# Altium PCB P503CA.PcbDoc
Units mm, origin at the board's own origin, x right, y up, seen from the top; angles counter-clockwise.
Board outline 26 x 26 mm, 2 copper layers (Top Layer, Bottom Layer); 2 components, 2 nets, 6 pads, 0 vias.
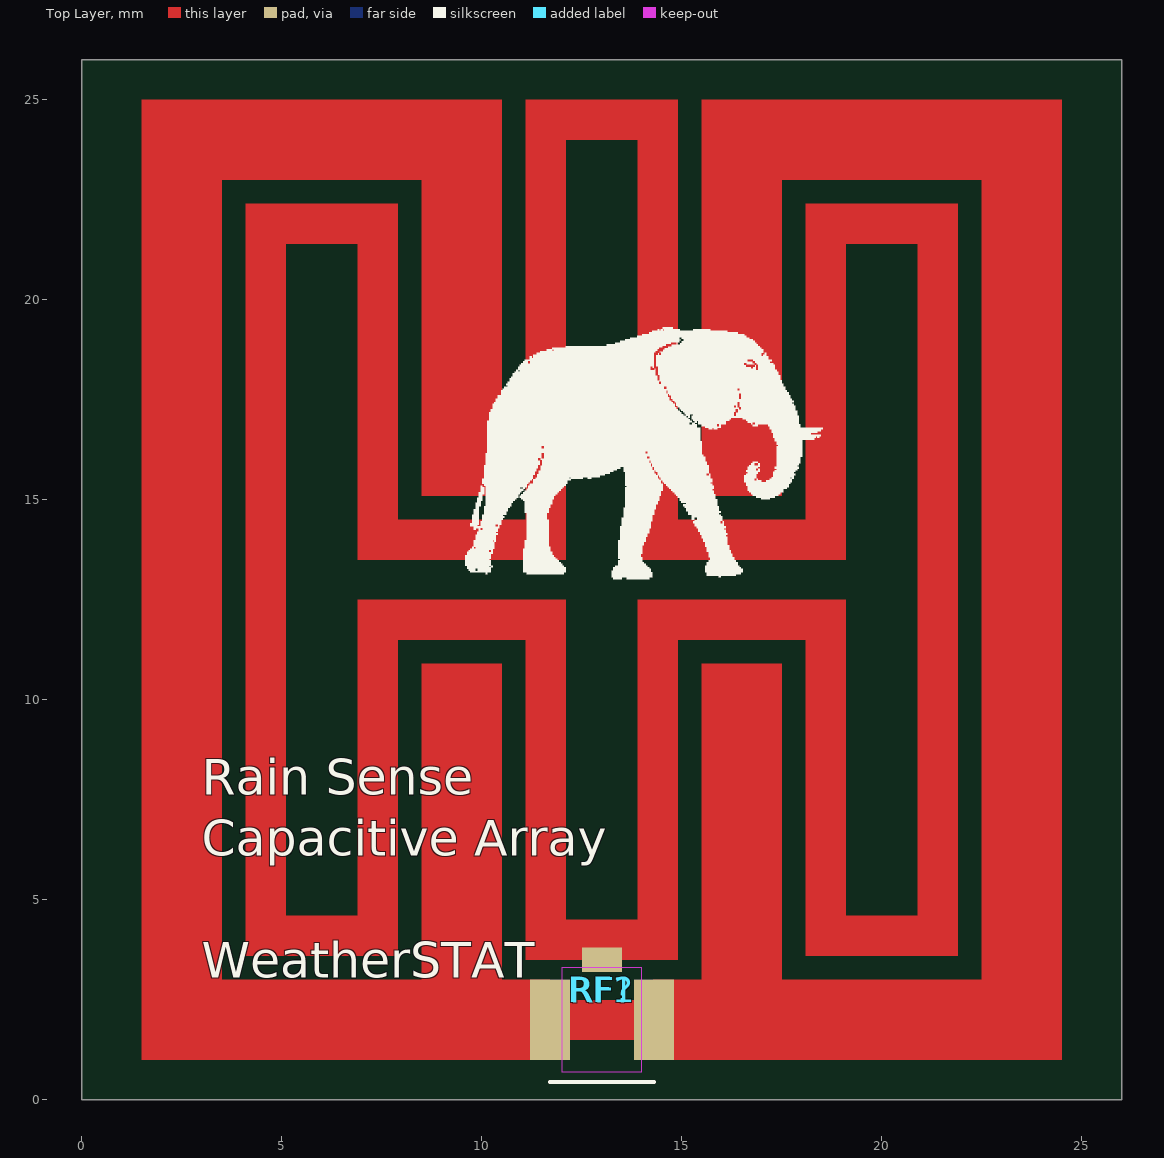
[diagram p0: Top Layer view]
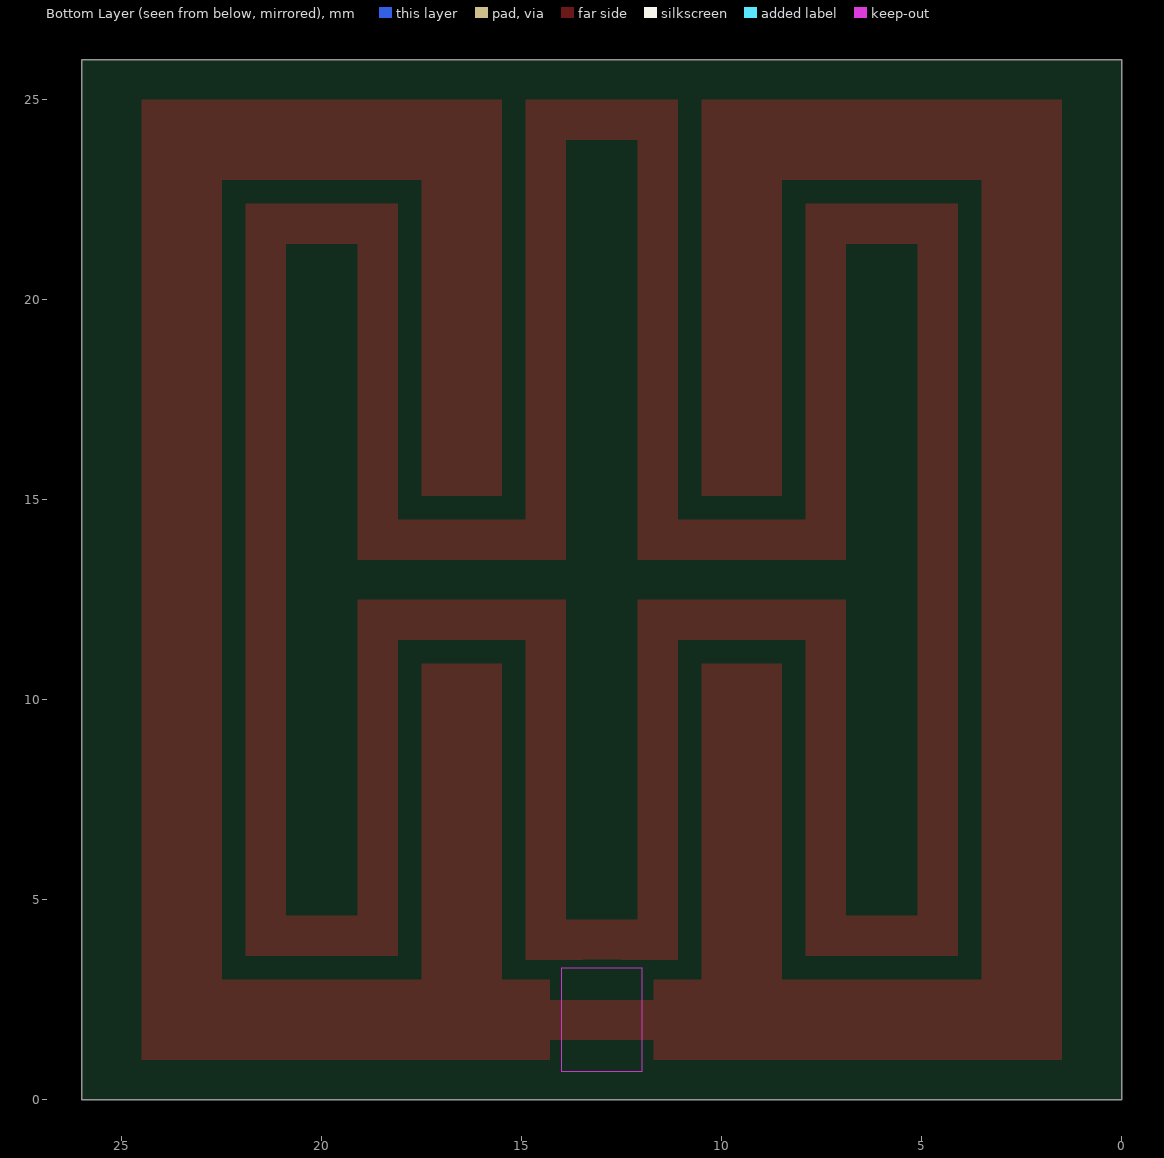
[diagram p1: Bottom Layer view, seen from below]

## Layer stack, top to bottom
Top Solder: solder mask 0.0102, Solder Resist, Dk 3.5
Top Layer: signal copper 0.0356
Dielectric 1: dielectric 0.32, FR-4, Dk 4.8
Bottom Layer: signal copper 0.0356
Bottom Solder: solder mask 0.0102, Solder Resist, Dk 3.5

## Board outline
0,0 0,26 26,26 26,0

## Design rules (kind name [scope] priority, off if disabled: settings)
BoardOutlineClearance [All] p1: gap=0.25 ignorepadtopadclearanceinfootprint=FALSE except(0: Arc-SplitContinuation Track-SplitContinuation SMDPad-SplitContinuation THPad-SplitContinuation Via-SplitContinuation Fill-SplitContinuation Poly-SplitContinuation Region-SplitContinuation Text-SplitContinuation)
Clearance Clearance-xPP-xTP-xTT [All] p1: gap=0.1 ignorepadtopadclearanceinfootprint=FALSE except(0: Arc-Hole Track-Hole SMDPad-Hole THPad-Hole Via-Hole Fill-Hole Poly-Hole Region-Hole Text-Hole)
ComponentClearance [All] p1: gap=0.25 collisioncheckmode=3 verticalgap=0.25 showdistances=FALSE
DiffPairsRouting [All] p1: maxlimit=0.25 minlimit=0.25 mostfreqgap=0.25 toplayer_minwidth=0.381 toplayer_maxwidth=0.381 toplayer_prefwidth=0.381 bottomlayer_minwidth=0.381 bottomlayer_maxwidth=0.381 bottomlayer_prefwidth=0.381 maxuncoupledlength=12.5
Height [All] p1: minheight=0 maxheight=25 prefheight=12.5
HoleSize HoleSize-PTH [All] p1: absolutevalues=TRUE maxlimit=5 minlimit=0.15 maxpercent=80.000 minpercent=20.000
HoleToHoleClearance [All] p1: gap=0.35 allowstackedmicrovias=TRUE
MinimumAnnularRing "Minimum IAR  <= 0.45mm" [((ObjectKind = 'Pad') OR (ObjectKind = 'Via')) And (Layer = 'MultiLayer') And (HoleDiameter <= AsMM(0.45))] p1: minimumring=0.125 // minimum inner annular ring for pads <= 0.45mm finished hole size
MinimumAnnularRing "Minimum IAR  > 0.45mm" [((ObjectKind = 'Pad') OR (ObjectKind = 'Via')) And (Layer = 'MultiLayer') And (HoleDiameter > AsMM(0.45))] p2: minimumring=0.125 // minimum inner annular ring for pads > 0.45mm finished hole size
MinimumAnnularRing Minimum-IAR [All] p3: minimumring=0.125
MinimumSolderMaskSliver [All] p1: minsoldermaskwidth=0.08
PlaneClearance [InNet('ANT_GSM')] p1: clearance=0.05
PlaneClearance PlaneClearance-IPI [All] p2: clearance=0.25
PlaneConnect [All] p1: planeconnectstyle=Relief reliefexpansion=0.175 reliefentries=4 reliefconductorwidth=0.2 reliefairgap=0.1
PolygonConnect PolygonConnect_Via [All vs (ObjectKind = 'Via') And (HoleDiameter <= AsMM(0.45))] p1: connectstyle=Direct reliefconductorwidth=0.254 reliefentries=4 polygonreliefangle="90 Angle" airgapwidth=0.254
PolygonConnect PolygonConnect-xTW [All] p2: connectstyle=Relief reliefconductorwidth=0.2 reliefentries=4 polygonreliefangle="90 Angle" airgapwidth=0.1
RoutingCorners [All] p1: cornerstyle=45-Degree minsetback=2.5 maxsetback=2.5
RoutingVias "RoutingVias <= 0.45mm" [(ObjectKind = 'Via') And (HoleDiameter <= AsMM(0.45))] p1: holewidth=0.2 width=0.55 viastyle="Through Hole" minholewidth=0.15 minwidth=0.5 maxholewidth=0.45 maxwidth=0.8
RoutingVias "RoutingVias > 0.45mm" [(ObjectKind = 'Via') And (HoleDiameter > AsMM(0.45))] p2: holewidth=0.5 width=0.85 viastyle="Through Hole" minholewidth=0.5 minwidth=0.85 maxholewidth=0.9 maxwidth=1.25
SilkToSilkClearance [All] p1: silktosilkclearance=0.2
SilkToSolderMaskClearance SilkscreenOverComponentPads [IsPad] p1: minsilkscreentomaskgap=0.1 clearancetoexposedcopper=TRUE
SolderMaskExpansion SolderMaskExpansion_Via [(ObjectKind = 'Via') And (HoleDiameter <= AsMM(0.45))] p1: expansion=0.01 istentingtop=TRUE soldermaskfromhole=TRUE
SolderMaskExpansion [All] p2: expansion=0.01 istentingtop=FALSE
UnRoutedNet [All] p1: checkbadconnections=TRUE
Width Width-xTW [All] p1: maxlimit=1.5 minlimit=0.1 preferedwidth=0.2
18 further rules are at their usual default settings.

## Components (designator, comment, footprint, x,y, rotation, side; value= is the part's Value field where it differs from the comment)
RF1 "Sense Plate" Capacitve_Sense_Plate 13,13 r0 top locked
RF? "Connector" Connector_IPEX 13,2 r180 top locked

## Footprints (in the part's own frame and the unit in brackets; to place one, negate y for a bottom-side part, rotate by r counter-clockwise, add the part's x,y. Pads: shape width x height; smd on the part's side, far side on the other; paste and mask are expansions set on the pad)
Capacitve_Sense_Plate [mm] "Plate"
  rect 1x0.6 smd mask+0.01: 1(0,-9.493)
  rect 1x2 smd mask+0.01: 2(-1.3,-10.993) 2(1.3,-10.993)
  Top Layer region: 0.9,-8.493 -0.9,-8.493 -0.9,-9.493 0.9,-9.493
  Top Layer region: 0.9,12 -0.9,12 -0.9,11 0.9,11
  Top Layer region: 0.483,-8.493 0.9,-8.493 0.9,-8.493 0.9,-0.5 6.1,-0.5 6.1,-0.5 6.1,-8.4 7.9,-8.4 7.9,8.4 6.1,8.4 6.1,0.5 0.9,0.5 0.9,0.5 0.9,11 0,11 0,12 1.9,12 1.9,1.5 5.1,1.5 5.1,1.5 5.1,9.4 8.9,9.4 8.9,9.4 8.9,-9.4 5.1,-9.4 5.1,-9.4 5.1,-1.5 1.9,-1.5 1.9,-1.5 1.9,-9.493 0.483,-9.493
  Top Layer region: -0.483,-8.493 -0.9,-8.493 -0.9,-0.5 -0.9,-0.5 -0.9,-0.5 -6.1,-0.5 -6.1,-8.4 -6.1,-8.4 -7.9,-8.4 -7.9,8.4 -7.9,8.4 -6.1,8.4 -6.1,0.5 -6.1,0.5 -0.9,0.5 -0.9,11 -0.9,11 0,11 0,12 -1.9,12 -1.9,12 -1.9,1.5 -5.1,1.5 -5.1,1.5 -5.1,1.5 -5.1,9.4 -8.9,9.4 -8.9,9.4 -8.9,-9.4 -5.1,-9.4 -5.1,-9.4 -5.1,-9.4 -5.1,-1.5 -1.9,-1.5 -1.9,-1.5 -1.9,-9.493 -0.483,-9.493
  Top Layer region: 1.3,-10 2.5,-10 2.5,-2.1 4.5,-2.1 4.5,-10 9.5,-10 9.5,10 4.5,10 4.5,2.1 4.5,2.1 2.5,2.1 2.5,12 2.5,12 11.5,12 11.5,-12 11.5,-12 1.3,-12
  Top Layer region: -1.3,-12 -11.5,-12 -11.5,12 -11.5,12 -2.5,12 -2.5,2.1 -4.5,2.1 -4.5,10 -4.5,10 -9.5,10 -9.5,-10 -4.5,-10 -4.5,-2.1 -2.5,-2.1 -2.5,-10 -1.3,-10
Connector_IPEX [mm]
  rect 1x0.6 smd mask+0.01: 1(0,-1.5)
  rect 1x2 smd mask+0.01: 2(-1.3,0) 2(1.3,0)
  Keep-Out Layer region: -1,-1.3 1,-1.3 1,1.3 -1,1.3
  silkscreen extent -1.3,1.55 1.3,1.55, body extent -1.5,-1.55 1.5,1.55, height 1.25

## Part data
RF1: library part "PCB - Capacitive Sense Plate", Supplier Part Number 1=U.FL-R-SMT-1(10), ROHS=Yes, Supplier 1=Arrow, Supplier 2=Digi-Key, Supplier 3=Digi-Key, Supplier 4=Digi-Key, Supplier Part Number 2=H11891TR-ND, Supplier Part Number 3=H11891CT-ND, Supplier Part Number 4=H11891DKR-ND
RF?: library part "Connector - MHF", "Analog Signal MHF4 Connector", Supplier Part Number 1=200-RSP-122811-01, ROHS=Yes, Supplier 1=Mouser, Supplier 2=Arrow, Supplier Part Number 2=RSP-122811-01

## Nets (pads, with @x,y where several pads share a name; then routed paths per layer and width w, separated by ;. In a path a pad name is that pad's centre, name@x,y a point inside that pad or via, vN(x,y) a via of type N, cw(c..) or ccw(c..) an arc to the next point about the centre after c; other vN are vias at no path point)
GND: RF1.2 RF?.2 | length 2.6
  Top Layer w1: RF?.2@11.7,2 RF?.2@14.3,2
NetRF1_1: RF1.1 RF?.1

## Silkscreen, mask and mechanical layers (free items; w line width, h text height)
Top Overlay:
  region: 1402 vertices and 36 holes, not listed, extent 9.585,13.019 18.517,19.313
Mechanical 1:
  the board outline again, w0.254

## Text inside footprints (layer, text, board x,y; h text height)
RF1: Top Overlay "Rain Sense / Capacitive Array /  / WeatherSTAT" at 3,2.759 h1.52